# Altium PCB BDCMC_PCB.PcbDoc
Units mil, origin at the board's own origin, x right, y up, seen from the top; angles counter-clockwise.
Board outline 3500 x 2000 mil, 4 copper layers (Top Layer, Mid Layer 1, Mid Layer 2, Bottom Layer), stack 78.937 mil thick; 114 components, 60 nets, 405 pads, 112 vias.
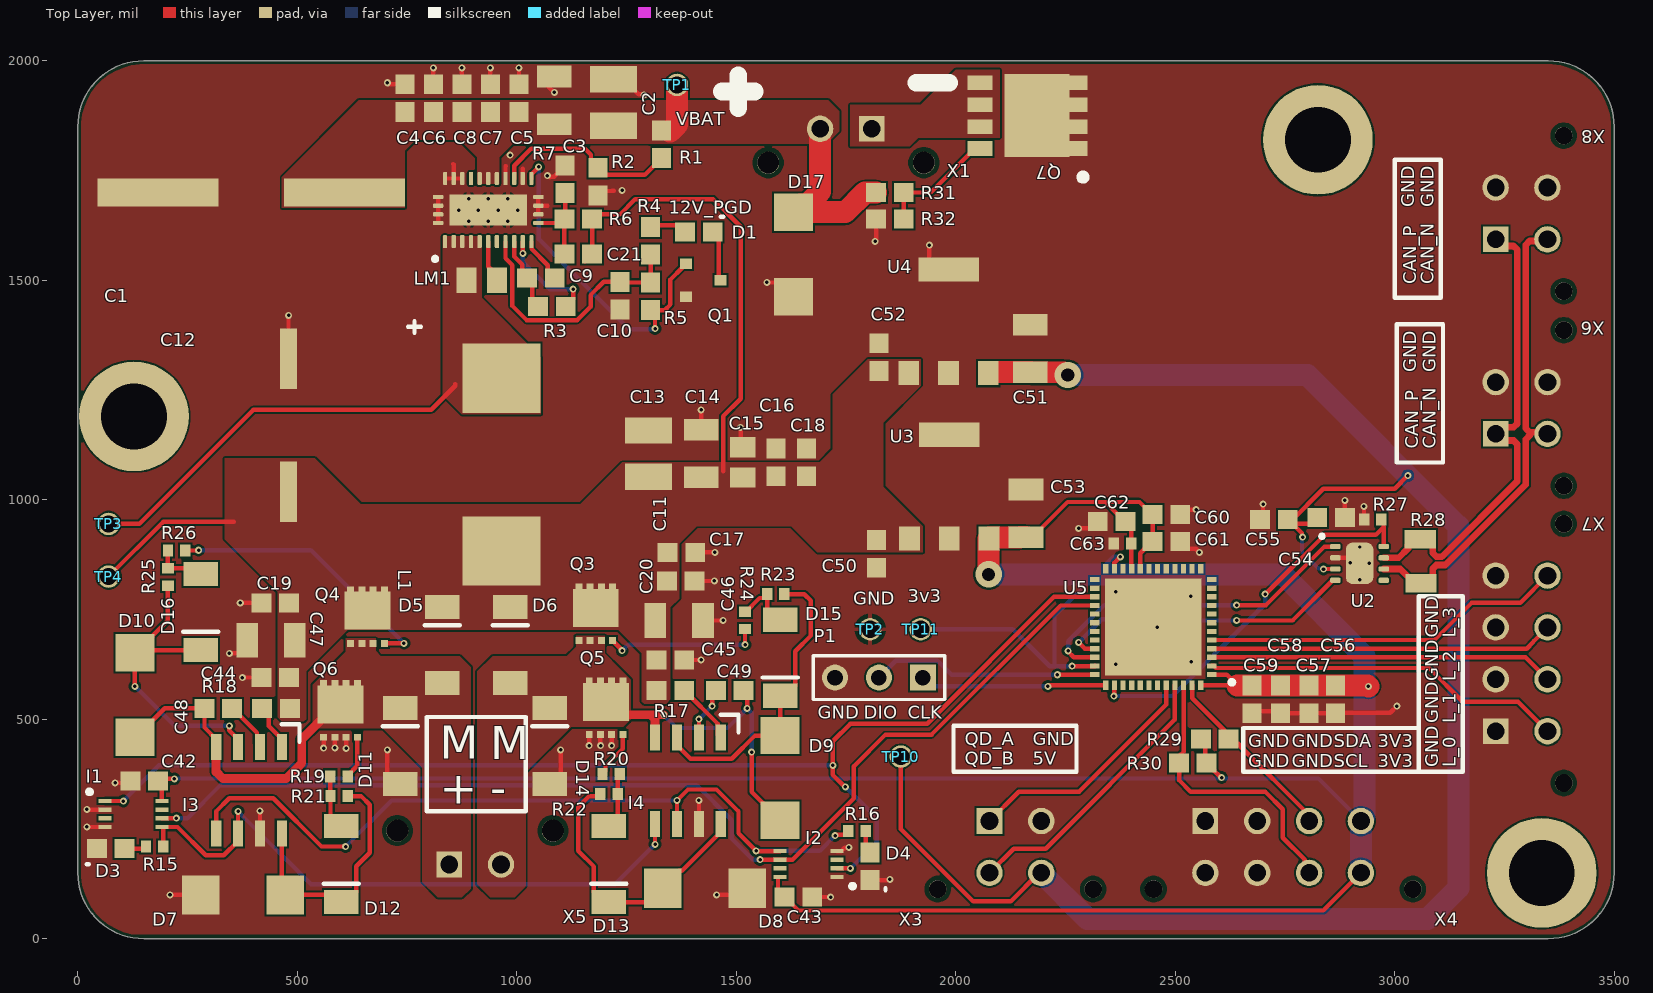
[diagram p0: Top Layer view]
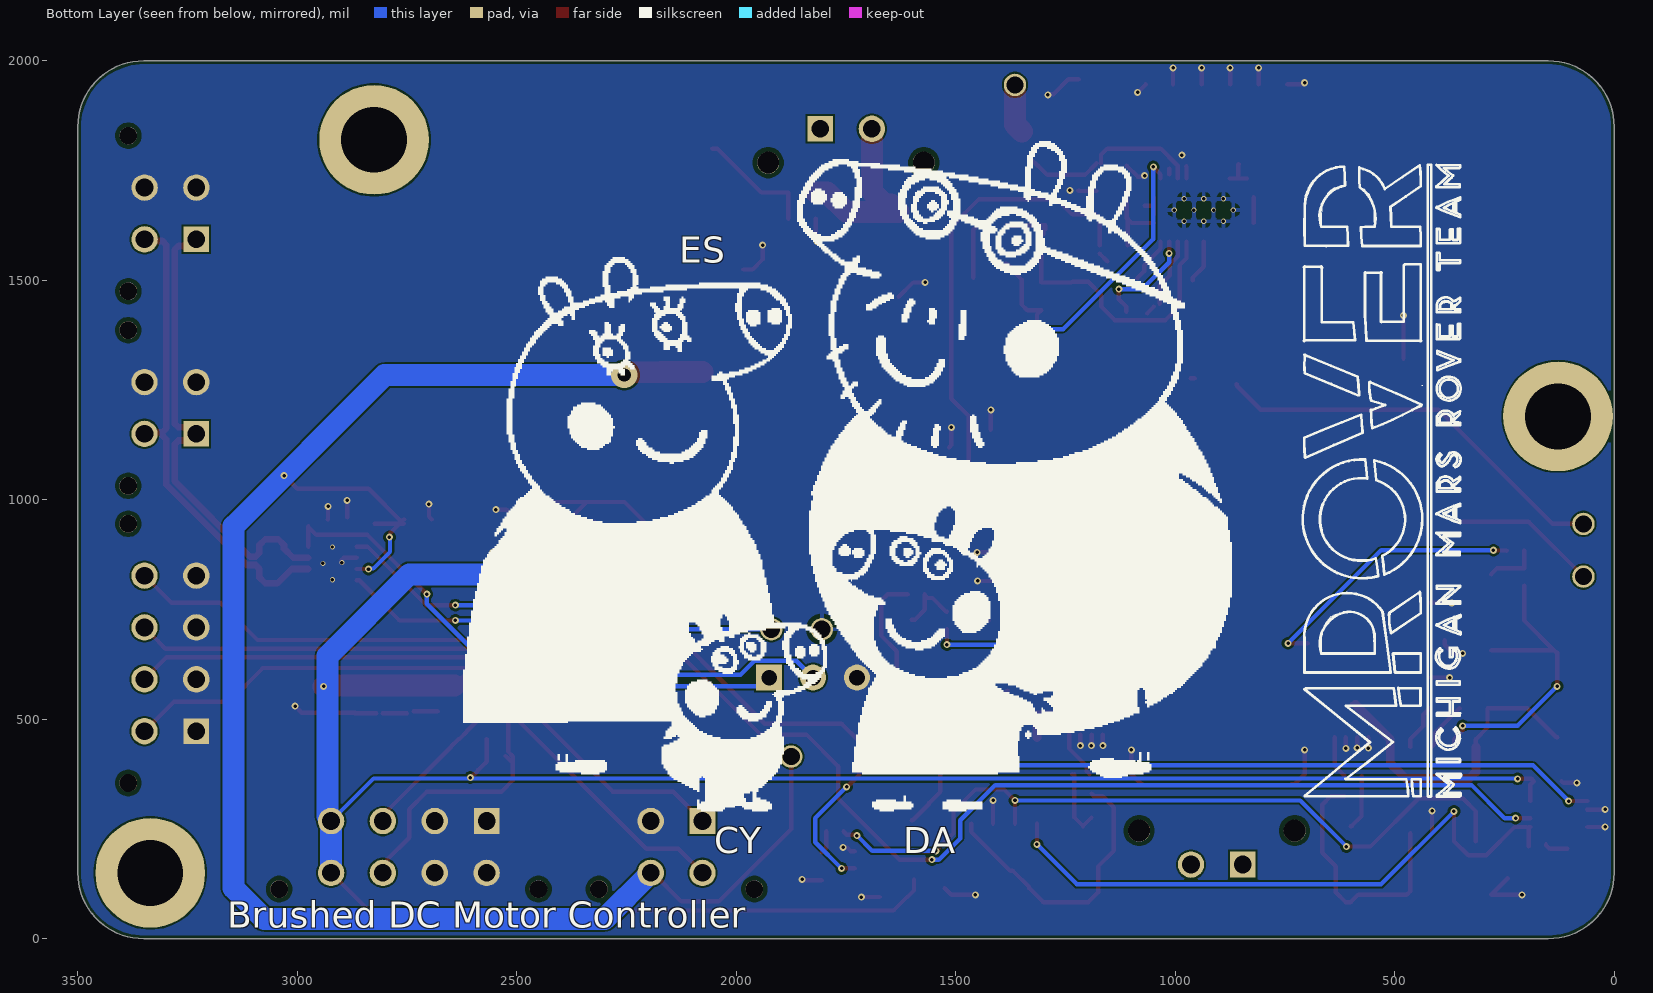
[diagram p1: Bottom Layer view, seen from below]
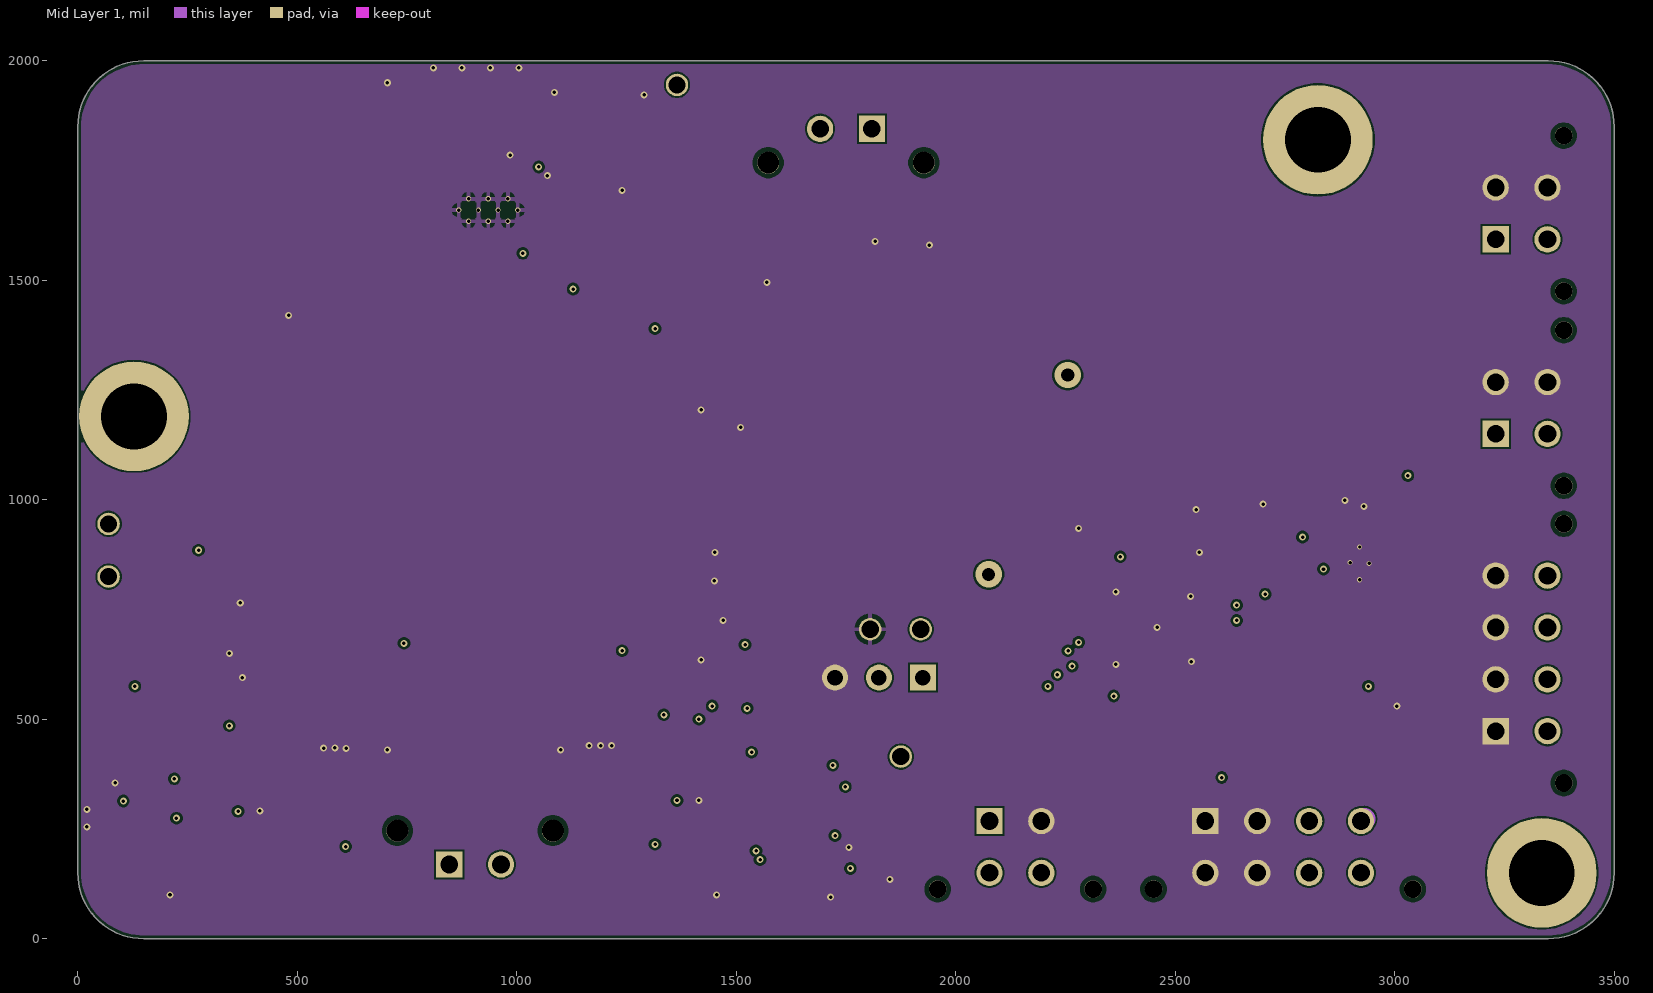
[diagram p2: Mid Layer 1]
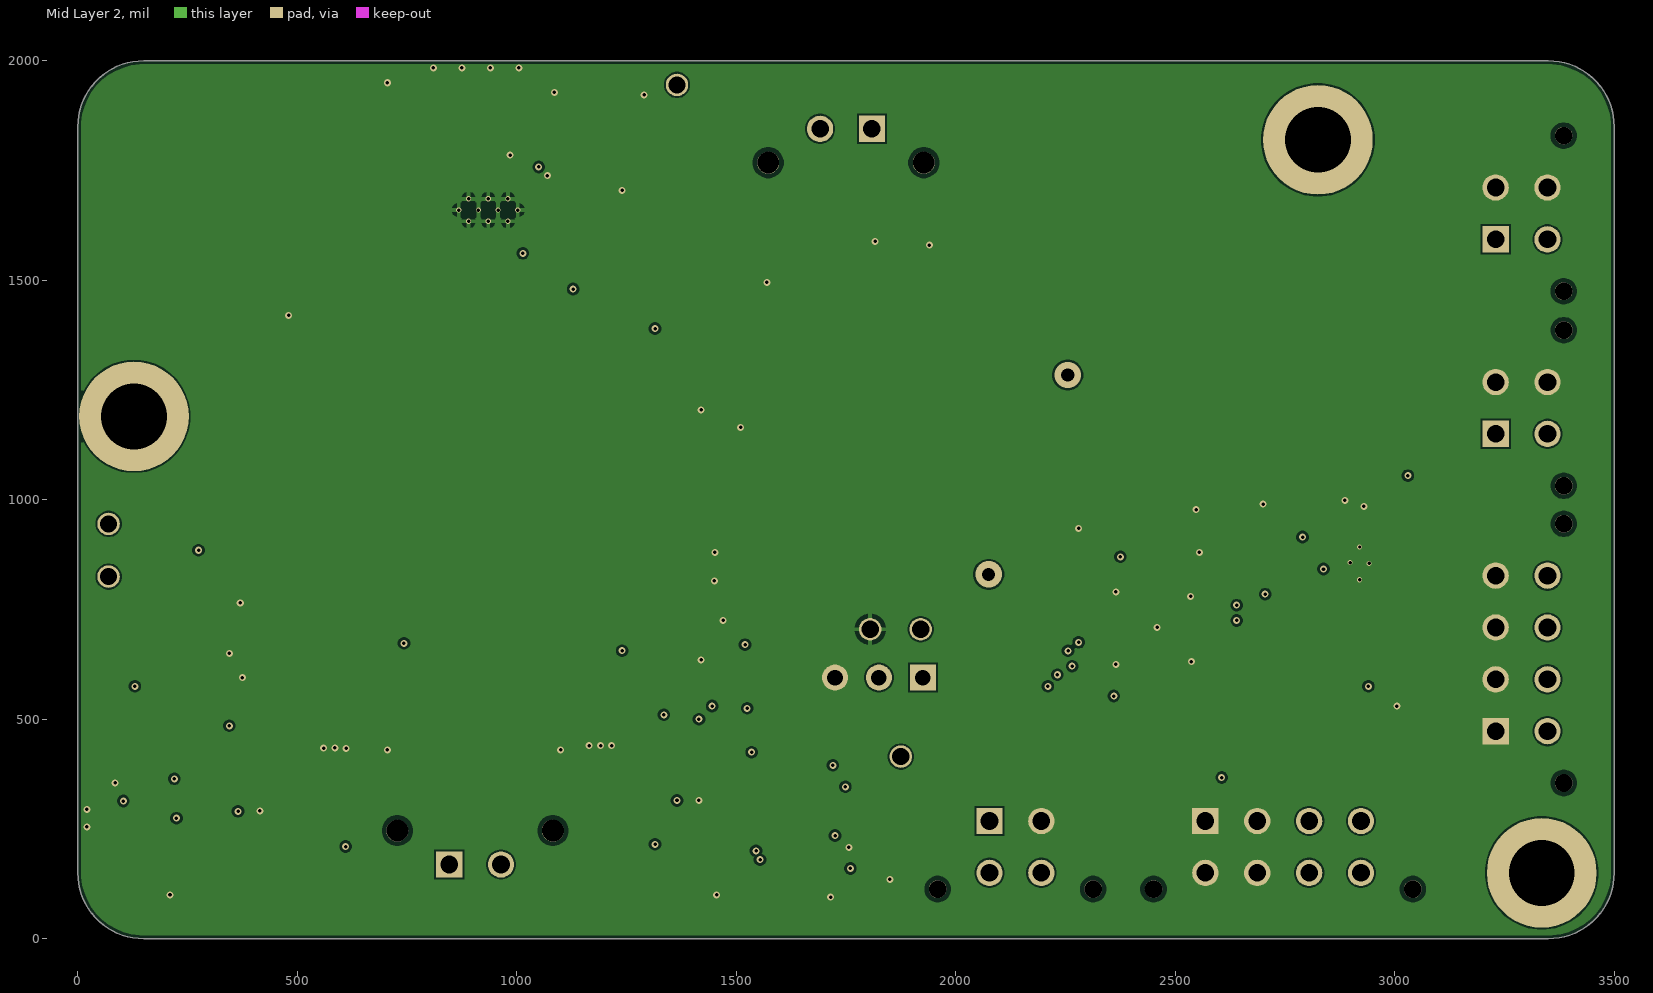
[diagram p3: Mid Layer 2]

## Layer stack, top to bottom
Top Solder: solder mask 0.5, Solder Resist, Dk 3.8
Top Layer: signal copper 1.378
Dielectric 1: prepreg 7.874, 7628, Dk 4.6
Mid Layer 1: signal copper 1.378
Core: core 57.6772, FR-4, Dk 4.5
Mid Layer 2: signal copper 1.378
Dielectric 2: prepreg 7.874, 7628, Dk 4.6
Bottom Layer: signal copper 1.378
Bottom Solder: solder mask 0.5, Solder Resist, Dk 3.8

## Board outline
0,150 0,1850 cw(c150,1850) 150,2000 3350,2000 cw(c3350,1850) 3500,1850 3500,150 cw(c3350,150) 3350,0 150,0 cw(c150,150)

## Design rules (kind name [scope] priority, off if disabled: settings)
BoardOutlineClearance [All] p1: gap=7.87 ignorepadtopadclearanceinfootprint=FALSE
Clearance [All] p1: gap=4 ignorepadtopadclearanceinfootprint=FALSE except(5: Arc-Via Track-Via SMDPad-Via THPad-Via Via-Via Via-Fill Via-Poly Via-Region Via-Text; 9.84: Arc-Hole Track-Hole SMDPad-Hole THPad-Hole Via-Hole Fill-Hole Poly-Hole Region-Hole Text-Hole)
ComponentClearance [All] p1: gap=4 collisioncheckmode=3 verticalgap=4 showdistances=TRUE
DiffPairsRouting [All] p1: maxlimit=4 minlimit=4 mostfreqgap=4 toplayer_minwidth=4 toplayer_maxwidth=71497.94 toplayer_prefwidth=4 midlayer1_minwidth=4 midlayer1_maxwidth=71497.94 midlayer1_prefwidth=4 midlayer2_minwidth=4 midlayer2_maxwidth=71497.94 midlayer2_prefwidth=4 bottomlayer_minwidth=4 bottomlayer_maxwidth=71497.94 bottomlayer_prefwidth=4 maxuncoupledlength=500
Height [All] p1: minheight=0 maxheight=71497.94 prefheight=500
HoleSize [All] p1: absolutevalues=TRUE maxlimit=248.03 minlimit=7.87 maxpercent=80.000 minpercent=20.000
HoleToHoleClearance [All] p1: gap=9.84 allowstackedmicrovias=FALSE
MinimumAnnularRing [All] p1: minimumring=3
MinimumSolderMaskSliver [All] p1: minsoldermaskwidth=0
PlaneClearance [All] p1: clearance=4
PlaneConnect PlaneConnectPowerPads [InPadClass('PowerPads')] p1: planeconnectstyle=Direct reliefexpansion=20 reliefentries=4 reliefconductorwidth=10 reliefairgap=10
PlaneConnect [All] p2: pad.planeconnectstyle=Relief pad.reliefexpansion=11.81 pad.reliefentries=4 pad.reliefconductorwidth=4 pad.reliefairgap=4 via.planeconnectstyle=Direct via.reliefexpansion=11.81 via.reliefentries=4 via.reliefconductorwidth=5 via.reliefairgap=5
PolygonConnect PolygonConnectPowerPads [All vs (InPadClass('PowerPads'))] p1: connectstyle=Direct reliefconductorwidth=10 reliefentries=4 polygonreliefangle="90 Angle" airgapwidth=10
PolygonConnect [All] p2: connectstyle=Direct reliefconductorwidth=4 reliefentries=4 polygonreliefangle="90 Angle" airgapwidth=4
RoutingVias [All] p1: holewidth=7.87 width=17.72 viastyle="Through Hole" minholewidth=7.87 minwidth=17.72 maxholewidth=248.03 maxwidth=257.87
SilkToSilkClearance [All] p1: silktosilkclearance=0
SilkToSolderMaskClearance [IsPad] p1: minsilkscreentomaskgap=4 clearancetoexposedcopper=TRUE
SolderMaskExpansion [All] p1: expansion=2.95 istentingtop=FALSE
Width [All] p1: maxlimit=71497.94 minlimit=4 preferedwidth=4
20 further rules are at their usual default settings.

## Classes and differential pairs
component class MCU_CAN: C50 C51 C52 C53 C54 C55 C56 C57 C58 C59 C60 C61 C62 C63 P1 R27 R28 R29 R30 TP10 TP11 U2 U3 U4 U5
component class HBridge_Top_Level: C42 C43 D3 D4 I1 I2 R15 R16
component class HBridge_Design: C44 C45 C46 C47 C48 C49 D5 D6 D7 D8 D9 D10 D11 D12 D13 D14 D15 D16 I3 I4 Q3 Q4 Q5 Q6 R17 R18 R19 R20 R21 R22 R23 R24 R25 R26
component class Connectors: D17 Q7 R31 R32 X1 X3 X4 X5 X6 X7 X8
component class Motor_12V_Buck: 3 C1 C2 C3 C4 C5 C6 C7 C8 C9 C10 C11 C12 C13 C14 C15 C16 C17 C18 C19 C20 C21 D1 L1 LM1 Q1 R1 R2 R3 R4 R5 R6 R7 TP1 TP2 TP3 TP4
differential pair CAN: +CAN_P -CAN_N

## Components (designator, comment, footprint, x,y, rotation, side; value= is the part's Value field where it differs from the comment)
C1 "100SEV100M12.5X16" ELEC-100U-0001 395,1700 r270 top
C2 "C3225X7R1N106K250AC" CAP-1210 1220,1905 r90 top
C3 "CL31B105KCHNNNE" "CAP-1206 - duplicate" 1085,1905 r90 top
C4 "CC0603KRX7R0BB104" CAP-0603 745,1915 r90 top
C5 "C1608C0G2A103J080AC" CAP-0603 1005,1915 r90 top
C6 "C0603Y102K1RAC7867" CAP-0603 810,1915 r90 top
C7 "0603N101J101CT" CAP-0603 940,1915 r90 top
C8 "0603N100J500CT" CAP-0603 875,1915 r90 top
C9 "CC0603KRX7R9BB333" CAP-0603 1055,1505 r180 top
C10 "UMK107BBJ225KA-T" CAP-0603 1235,1465 r270 top
C11 "KAM21KR72A474KL" CAP-0805 920,1500 r0 top
C12 "50TZV220M10X10.5" ELEC-220U-0003 480,1170 r0 top
C13 "C3225X7R1N106K250AC" CAP-1210 1300,1105 r90 top
C14 "CL31B105KCHNNNE" "CAP-1206 - duplicate" 1420,1100 r90 top
C15 "KAM21KR72A474KL" CAP-0805 1515,1085 r90 top
C16 "CC0603KRX7R0BB104" CAP-0603 1590,1085 r90 top
C17 "C1608C0G2A103J080AC" CAP-0603 1375,880 r0 top
C18 "C0603Y102K1RAC7867" CAP-0603 1660,1085 r90 top
C19 "0603N101J101CT" CAP-0603 450,765 r180 top
C20 "0603N100J500CT" CAP-0603 1373.5,815 r0 top
C21 "885012006087" CAP-0603 1140,1560 r180 top
C42 "CC0603KRX7R0BB104" CAP-0603 151.5,359 r180 top
C43 "CC0603KRX7R0BB104" CAP-0603 1641.5,95 r180 top
C44 "C1608C0G2A103J080AC" CAP-0603 450,595 r180 top
C45 "C1608C0G2A103J080AC" CAP-0603 1350,635 r0 top
C46 "CAP-1U-0001" "CAP-1206 - duplicate" 1365,725 r0 top
C47 "CAP-1U-0001" "CAP-1206 - duplicate" 445,680 r180 top
C48 "CC0603KRX7R0BB104" CAP-0603 320,525 r180 top
C49 "CC0603KRX7R0BB104" CAP-0603 1485,565 r0 top
C50 "CGA3E3X7R1H334K080AB" CAP-0603 1820,876.5 r270 top
C51 "CL31B106KBHNNNE" CAP-1206 2170,1345 r90 top
C52 "CGA3E3X7R1H334K080AB" CAP-0603 1825,1325 r90 top
C53 "CL31B106KBHNNNE" CAP-1206 2160,969.13 r90 top
C54 "TMK107BBJ475KA-T" CAP-0603 2855,960 r0 top
C55 "CC0603KRX7R0BB104" CAP-0603 2725,955 r180 top
C56 "TMK107BBJ475KA-T" CAP-0603 2865,545 r270 top
C57 "CC0603KRX7R0BB104" CAP-0603 2805,545 r270 top
C58 "CC0603KRX7R0BB104" CAP-0603 2740,545 r270 top
C59 "CC0603KRX7R0BB104" CAP-0603 2675,545 r270 top
C60 "UMK107AB7105KA-T" CAP-0603 2480,966 r0 top
C61 "CC0603KRX7R0BB104" CAP-0603 2480,905 r0 top
C62 "UMK107AB7105KA-T" CAP-0603 2355,950 r180 top
C63 "CC0402KRX7R0BB103" CAP-0402 2380,900 r180 top
D1 "150060AS75000" LED-0603 1415,1610 r0 top
D3 "150060AS75000" LED-0603 75,205 r180 top
D4 "150060AS75000" LED-0603 1805,165 r270 top
D5 "PMEG6030EP,115" DIO-SOD128 830,669 r180 top
D6 "PMEG6030EP,115" DIO-SOD128 985,669 r180 top
D7 "SMBJ12CA" "DO-214AA (SMBJ)" 375,100 r0 top
D8 "SMBJ12CA" "DO-214AA (SMBJ)" 1430,115 r180 top
D9 "SMBJ12CA" "DO-214AA (SMBJ)" 1600,365 r90 top
D10 "SMBJ12CA" "DO-214AA (SMBJ)" 130,554 r90 top
D11 "PMEG6030EP,115" DIO-SOD128 735,439 r180 top
D12 "PMEG6030EP,115" DIO-SOD128 600,170 r0 top
D13 "PMEG6030EP,115" DIO-SOD128 1210,170 r0 top
D14 "PMEG6030EP,115" DIO-SOD128 1075,439 r180 top
D15 "PMEG6030EP,115" DIO-SOD128 1600,640 r0 top
D16 "PMEG6030EP,115" DIO-SOD128 280,744 r0 top
D17 "SMBJE43CAH" "DO-214AA (SMBJ)" 1630,1560 r270 top
I1 "SN74LVC2G157DCUR" IC-MUX-8VSSOP 61.57,254.63 r0 top
I2 "SN74LVC2G157DCUR" IC-MUX-8VSSOP 1729.92,199.69 r180 top
I3 "UCC27284QDQ1" IC-BUCK-8SOIC 390,338.43 r180 top
I4 "UCC27284QDQ1" IC-BUCK-8SOIC 1390,360 r180 top
L1 "SRP1270-100M" PWRIND-10U-0002 965,1080 r270 top
LM1 "LM76005RNPR" IC-30-WQFN(6x4) 935,1660 r90 top
P1 "Header 3" HDR1X3 1925,595 r180 top
Q1 "T2N7002AK,LM" NMOS-SOT23-3 1425,1500 r270 top
Q3 "TPN11006PL,LQ" NMOS-8TSON 1180,740 r0 top
Q4 "TPN11006PL,LQ" NMOS-8TSON 660,734 r0 top
Q5 "TPN11006PL,LQ" NMOS-8TSON 1203.39,526.02 r0 top
Q6 "TPN11006PL,LQ" NMOS-8TSON 598.39,520.02 r0 top
Q7 "TPH7R006PL,L1Q" NMOS-8PowerVDFN 2275,1800 r90 top
R1 "RC0603FR-072M15L" RES-0603 1330,1810 r90 top
R2 "RC0603FR-07100KL" RES-0603 1185,1725 r270 top
R3 "RC0603FR-0776K8L" RES-0603 1080,1440 r180 top
R4 "AC0603FR-10100RL" RES-0603 1305,1590 r90 top
R5 "RC0603FR-0710KP" RES-0603 1305,1463.5 r90 top
R6 "RC0603FR-07100KL" RES-0603 1140,1640 r180 top
R7 "RC0603FR-079K09L" RES-0603 1110,1730 r90 top
R15 "RC0402JR-07100RP" RES-0402 175,210 r180 top
R16 "RC0402JR-07100RP" RES-0402 1775,245 r0 top
R17 "RNCP0603FTD1R00" RES-0603 1350,565 r180 top
R18 "RNCP0603FTD1R00" RES-0603 451.5,525 r0 top
R19 "RC0402JR-0733RP" RES-0402 595,370 r0 top
R20 "RC0402JR-0733RP" RES-0402 1215,375 r0 top
R21 "RC0402JR-0733RP" RES-0402 595.32,325 r0 top
R22 "RC0402JR-0733RP" RES-0402 1210,330 r180 top
R23 "RC0402JR-0733RP" RES-0402 1590,785 r0 top
R24 "RC0402JR-0733RP" RES-0402 1520,725.32 r270 top
R25 "RC0402JR-0733RP" RES-0402 205,824 r270 top
R26 "RC0402JR-0733RP" RES-0402 225,884 r0 top
R27 "RC0402FR-074K7P" RES-0402 2950,955 r0 top
R28 "CRGH1206F120R" RES-1206 3060,860 r90 top
R29 "AF0603FR-074K7L" RES-0603 2590,455 r180 top
R30 "AF0603FR-074K7L" RES-0603 2540,400 r0 top
R31 "ERJ-3EKF2003V" RES-0603 1850,1700 r0 top
R32 "RC0603FR-07100KL" RES-0603 1850,1640 r0 top
TP1 "5003" TEST-POINT-0001 1365,1945 r270 top
TP2 "5003" TEST-POINT-0001 1805,705 r0 top
TP3 "5003" TEST-POINT-0001 70,945 r90 top
TP4 "5003" TEST-POINT-0001 70,825 r90 top
TP10 "5003" TEST-POINT-0001 1875,415 r270 top
TP11 "5003" TEST-POINT-0001 1920,705 r180 top
U2 "TCAN1042HGDRBTQ1" IC-8-VSON 2920,855 r0 top
U3 "UA78M33CDCYR" IC-SOT-223-4 1985,1030 r90 top
U4 "UA78M05IDCYR" IC-SOT-223-4 1983.74,1406.55 r90 top
U5 "STM32G431CBU6" MCU-UFQFPN48 2450,710 r180 top
X1 "Molex 43650-0215" 43650-0215 1750,1845 r0 top
X3 "Molex 43045-0412" 43045-0412 2135.94,268.11 r180 top
X4 "Molex 43045-0812" 43045-0812 2745.94,268.11 r180 top
X5 "Molex 43650-0215" 43650-0215 905,169 r180 top
X6 "Molex 43045-0412" 43045-0412 3230,1209.06 r270 top
X7 "Molex 43045-0812" 43045-0812 3230,650 r270 top
X8 "Molex 43045-0412" 43045-0412 3229.88,1652.17 r270 top

## Footprints (in the part's own frame and the unit in brackets; to place one, negate y for a bottom-side part, rotate by r counter-clockwise, add the part's x,y. Pads: shape width x height; smd on the part's side, far side on the other; paste and mask are expansions set on the pad)
43045-0412 [mm]
  round 1.02 hole 1.02 unplated: 1(-4.5,3.94) 1(4.5,3.94)
  rect 1.482x1.482 / inner rect 1.524x1.524 / far side rect 1.482x1.482 hole 1.02: P$1(1.5,0)
  round 1.53 / inner round 1.524 / far side round 1.53 hole 1.02: P$2(-1.5,0) P$3(1.5,3) P$4(-1.5,3)
  body extent -5.07,-2.45 5.08,6.32, height 10.03
43045-0812 [mm]
  round 1.02 hole 1.02 unplated: 1(-7.5,3.94) 1(7.5,3.94)
  rect 1.482x1.482 / inner rect 1.524x1.524 / far side rect 1.482x1.482 hole 1.02: P$1(4.5,0)
  round 1.53 / inner round 1.524 / far side round 1.53 hole 1.02: P$2(1.5,0) P$3(-1.5,0) P$4(-4.5,0) P$5(4.5,3) P$6(1.5,3) P$7(-1.5,3) P$8(-4.5,3)
  body extent -8.07,-2.45 8.08,6.32, height 10.03
43650-0215 [mil]
  round 50 hole 50 unplated: 1(-177.17,-77.17) 1(177.17,-77.17)
  rect 58.33x58.33 / inner rect 60x60 / far side rect 58.33x58.33 hole 40.16: P$1(59.06,0)
  round 60.24 / inner round 60 / far side round 60.24 hole 40.16: P$2(-59.06,0)
  body extent -190,-97 190,123, height 395
CAP-0402 [mm]
  rect 0.6x0.7 smd: 1(-0.5,0) 2(0.5,0)
  body extent -0.5,-0.22 0.5,0.23, height 0.5
CAP-0603 [mm]
  rect 1.15x1.1 smd: 1(-0.8,0) 2(0.8,0)
  body extent -0.8,-0.45 0.8,0.45, height 0.8
CAP-0805 [mm]
  rect 1.16x1.47 smd: 1(-0.88,0) 2(0.88,0)
  body extent -1,-0.63 1,0.63, height 0.94
CAP-1206 [mm]
  rect 1.25x2 smd: 1(-1.375,0) 2(1.375,0)
  body extent -1.6,-0.8 1.6,0.8, height 1.5
"CAP-1206 - duplicate" [mm]
  rect 1.25x2 smd: 1(-1.248,0) 2(1.502,0)
  body extent -1.47,-0.8 1.73,0.8, height 1.5
CAP-1210 [mm]
  rect 1.53x2.72 smd: 1(-1.341,0) 2(1.341,0)
  body extent -1.6,-1.25 1.6,1.25, height 2.7
DIO-SOD128 [mm]
  rect 2x1.4 smd: 1(0,2.2) 2(0,-2.2)
  silkscreen extent -1.02,-1.14 1.02,-1.14, body extent -1.25,-2.35 1.25,2.35, height 1.05
"DO-214AA (SMBJ)" [mm]
  rect 2.16x2.26 smd: 1(-2.416,0) 2(2.484,0)
  body extent -2.72,-1.95 2.78,1.95, height 2.45
ELEC-100U-0001 [mm]
  rect 1.6x7 smd: 1(0,5.4) 2(0,-5.4)
  silkscreen extent 7.45,9.08 8.13,9.82, body extent -6.6,-7.15 6.6,7.15, height 16.56
ELEC-220U-0003 [mm]
  rect 1x3.5 smd: 1(0,-3.85) 2(0,3.85)
  body extent -5.25,-5.45 5.25,5.45, height 10.54
HDR1X3 [mm] "Connector; Header; 3 Position"
  rect 1.5x1.5 hole 0.9: 1(0,0)
  round 1.5 hole 0.9: 2(2.54,0) 3(5.08,0)
  silkscreen extent -1.27,-1.27 6.35,1.27
IC-8-VSON [mm]
  rrect50% 0.6x0.3 smd mask+0.07: 1(-1.4,0.975) 2(-1.4,0.325) 3(-1.4,-0.325) 4(-1.4,-0.975) 5(1.4,-0.975) 6(1.4,-0.325) 7(1.4,0.325) 8(1.4,0.975)
  rrect50% 1.6x2.4 smd: 9(0,0)
  silkscreen extent -2.26,1.48 -2.08,1.67, body extent -1.5,-1.5 1.5,1.5, height 1
IC-30-WQFN(6x4) [mm] "30 pin WQFN with exposed pad"
  rrect50% 0.75x0.25 smd mask+0.07: 1(-1.825,2.5) 2(-1.825,2) 3(-1.825,1.5) 4(-1.825,1) 5(-1.825,0.5) 6(-1.825,0) 7(-1.825,-0.5) 8(-1.825,-1) 9(-1.825,-1.5) 10(-1.825,-2) 11(-1.825,-2.5) 16(1.825,-2.5) 17(1.825,-2) 18(1.825,-1.5) 19(1.825,-1) 20(1.825,-0.5) 21(1.825,0) 22(1.825,0.5) 23(1.825,1) 24(1.825,1.5) 25(1.825,2) 26(1.825,2.5)
  rrect50% 0.25x0.6 smd mask+0.07: 12(-0.75,-2.9) 13(-0.25,-2.9) 14(0.25,-2.9) 15(0.75,-2.9) 27(0.75,2.9) 28(0.25,2.9) 29(-0.25,2.9) 30(-0.75,2.9)
  rect 1.8x4.5 smd: 31(0,0)
  silkscreen extent -2.94,2.96 -2.71,3.19, body extent -2,-3 2,3, height 0.8
IC-BUCK-8SOIC [mm]
  rect 0.6x1.5 smd: 1(-1.905,-2.5) 2(-0.635,-2.5) 3(0.635,-2.5) 4(1.905,-2.5) 5(1.905,2.5) 6(0.635,2.5) 7(-0.635,2.5) 8(-1.905,2.5)
  silkscreen extent -2.92,-3.81 -1.9,-2.79, body extent -2.45,-3 2.45,3, height 1.75
IC-MUX-8VSSOP [mm]
  rect 0.75x0.25 smd: 1(0,1.5) 2(0,1) 3(0,0.5) 4(0,0) 5(3.3,0) 6(3.3,0.5) 7(3.3,1) 8(3.3,1.5)
  silkscreen extent -1.02,1.91 -0.76,2.16, body extent 0.1,-0.24 3.2,1.76, height 0.9
IC-SOT-223-4 [mm]
  rect 1.4x1.2 smd mask+0.07: 1(-3,2.3) 2(-3,0) 3(-3,-2.3)
  rect 1.4x3.5 smd: 2(3,0)
  body extent -3.5,-3.25 3.5,3.25, height 1.68
LED-0603 [mm]
  rect 1.15x1.1 smd: 1(-0.8,0) 2(0.8,0)
  silkscreen extent 1.27,0.89 1.4,0.89, body extent -0.8,-0.3 0.8,0.3, height 1
MCU-UFQFPN48 [mm] "STM32G431CBU6"
  rect 0.55x0.3 smd mask+0.07: 1(-3.375,2.75) 2(-3.375,2.25) 3(-3.375,1.75) 4(-3.375,1.25) 5(-3.375,0.75) 6(-3.375,0.25) 7(-3.375,-0.25) 8(-3.375,-0.75) 9(-3.375,-1.25) 10(-3.375,-1.75) 11(-3.375,-2.25) 12(-3.375,-2.75) 25(3.375,-2.75) 26(3.375,-2.25) 27(3.375,-1.75) 28(3.375,-1.25) 29(3.375,-0.75) 30(3.375,-0.25) 31(3.375,0.25) 32(3.375,0.75) 33(3.375,1.25) 34(3.375,1.75) 35(3.375,2.25) 36(3.375,2.75)
  rect 0.3x0.55 smd mask+0.07: 13(-2.75,-3.375) 14(-2.25,-3.375) 15(-1.75,-3.375) 16(-1.25,-3.375) 17(-0.75,-3.375) 18(-0.25,-3.375) 19(0.25,-3.375) 20(0.75,-3.375) 21(1.25,-3.375) 22(1.75,-3.375) 23(2.25,-3.375) 24(2.75,-3.375) 37(2.75,3.375) 38(2.25,3.375) 39(1.75,3.375) 40(1.25,3.375) 41(0.75,3.375) 42(0.25,3.375) 43(-0.25,3.375) 44(-0.75,3.375) 45(-1.25,3.375) 46(-1.75,3.375) 47(-2.25,3.375) 48(-2.75,3.375)
  rect 5.6x5.6 smd: 49(0,0)
  silkscreen extent -4.68,3.08 -4.43,3.32, body extent -3.56,-3.56 3.56,3.56, height 0.61
NMOS-8PowerVDFN [mm]
  rect 0.85x1.45 smd: 1(0,5.588) 2(1.27,5.588) 2(2.54,5.588) 2(3.81,5.588)
  rect 0.85x1.05 smd: 3(0,-0.112) 3(1.27,-0.112) 3(2.54,-0.112) 3(3.81,-0.112)
  rect 4.8x3.75 smd: 3(1.905,2.286)
  silkscreen extent -1.91,-0.64 -1.4,-0.13
NMOS-8TSON [mm]
  rect 0.4x0.4 smd: 1(0.975,-1.55) 2(-0.975,-1.55) 2(-0.325,-1.55) 2(0.325,-1.55)
  rect 0.4x0.3 smd: 3(-0.975,1.6) 3(-0.325,1.6) 3(0.325,1.6) 3(0.975,1.6)
  rect 2.65x2.2 smd: 3(0,0.35)
  body extent -1.65,-1.65 1.65,1.65, height 0.85
NMOS-SOT23-3 [mm]
  rect 0.6x0.7 smd: 1(-0.95,-1) 2(0.95,-1) 3(0,1)
  body extent -1.46,-1.18 1.46,1.19, height 1.12
PWRIND-10U-0002 [mm]
  rect 4x4.5 smd: 1(-5,0) 2(5,0)
  body extent -6.85,-6.45 6.85,6.45, height 7.06
RES-0402 [mm]
  rect 0.6x0.7 smd: 1(-0.5,0) 2(0.5,0)
  body extent -0.5,-0.25 0.5,0.25, height 0.3
RES-0603 [mm]
  rect 1.15x1.1 smd: 1(-0.8,0) 2(0.8,0)
  body extent -0.8,-0.4 0.8,0.4, height 0.43
RES-1206 [mm]
  rect 1.05x1.8 smd: 1(-1.275,0) 2(1.275,0.043)
  body extent -1.6,-0.77 1.6,0.82, height 0.55
TEST-POINT-0001 [mm] "2024 miniature test point"
  round 1.3 hole 1: 1(0,0)
  body extent -1.27,-1.27 1.27,1.27, height 4.57

## Part data
C1: library part ELEC-100U-0001, "100 µF 100 V Aluminum Electrolytic Capacitors Radial, Can - SMD 2000 Hrs @ 85°C", Capacitance="100 uF", Manufacturer=Rubycon, Tolerance="+/- 20%", Voltage="100 V", Assembled?=No, ESR="idk check the datasheet i couldnt find it"
C2 C13: library part CAP-10U-0004, "10 µF ±10% 75V Ceramic Capacitor X7R 1210 (3225 Metric)", Capacitance="10 uF +/- 10%", Voltage Rating=75V
C3 C14: library part CAP-1U-0001, "1 µF ±10% 100V Ceramic Capacitor X7R 1206 (3216 Metric)", Capacitance="1 uF +/- 10%", Voltage=100V
C4 C16 C42 C43 C48 C49 C55 C57 C58 C59 C61: library part CAP-100N-0001, "CAP CER 0.1UF 100V X7R 0603", Capacitance="100nF +/-10%", Manufacturer=YAGEO, Package Size=0603, Temperature Coefficient=X7R, Voltage Rating=100V, Assembled?=no, Manufacturer Part Number=CC0603KRX7R0BB104
C5 C17 C44 C45: library part CAP-10N-0002, "CAP CER 10000PF 100V C0G 0603", Capacitance="10nF +/-5%", Manufacturer="TDK Corporation", Package Size=0603, Temperature Coefficient=C0G/NP0, Voltage Rating=100V, Assembled?=no, Manufacturer Part Number=C1608C0G2A103J080AC
C6 C18: library part CAP-1N-0001, "1000 pF ±10% 100V Ceramic Capacitor X7R 0603 (1608 Metric)", Capacitance="1 nF +/-10%", Voltage=100V
C7 C19: library part CAP-100P-0002, "100 pF ±5% 100V Ceramic Capacitor C0G, NP0 0603 (1608 Metric)", Capacitance="100 pF", Package Size=0603, Temp Coeff=C0G/NP0, Tolerance=+/-5%, Voltage=100V
C8 C20: library part CAP-10P-0001, "10 pF ±5% 50V Ceramic Capacitor C0G, NP0 0603 (1608 Metric)", Capacitance="10 pF +/- 5%", Manufacturer="Walshin Technology Corporation", Package Size=0603, Temperature Coefficient="C0G, NP0", Voltage Rating=50V, Assembled?=Yes, Manufacturer Part Number=0603N100J500CT
C9: library part CAP-33N-0001, "0.033 µF ±10% 50V Ceramic Capacitor X7R 0603 (1608 Metric)", Capacitance="33nF +/-10%", Manufacturer=YAGEO, Package Size=0603, Temperature Coefficient=X7R, Voltage Rating=50V, Assembled?=no, Manufacturer Part Number=CC0603KRX7R9BB333
C10: library part CAP-2.2U-0001, "2.2 µF ±10% 50V Ceramic Capacitor X5R 0603 (1608 Metric)", Capacitance="2.2 uF", oltage=50V
C11 C15: library part CAP-0.47U-0001, "0.47 µF ±10% 100V Ceramic Capacitor X7R 0805 (2012 Metric)", Capacitance="0.47 uF", Package Size=0805, Temperature Coefficient=X7R, Tolerance="+/- 10%", Voltage=100V, Assembled?=No
C12: library part ELEC-220U-0003, "220 µF 50 V Aluminum Electrolytic Capacitors Radial, Can - SMD 2000 Hrs @ 105°C", Capacitance="220 uF +/- 20%", Voltage Rating=50V, Size=.406inx.406in*.413in
C21: library part CAP-1P-0001, "1 pF ±0.25pF 100V Ceramic Capacitor C0G, NP0 0603 (1608 Metric)", Capacitance="1 pF", Package Size=0603, Temperature Coefficient=C0G/NP0, Tolerance="+/- 0.25 pF", Voltage=100V, Assembled?=No
C46 C47: "1 µF ±10% 100V Ceramic Capacitor X7R 1206 (3216 Metric)", Capacitance="1 uF +/- 10%", Voltage=100V
C50 C52: library part CAP-0.33uF-0001, "0.33 µF ±10% 50V Ceramic Capacitor X7R 0603 (1608 Metric)", Capacitance="0.33 uF", Manufacturer="TDK Corporation", Temperature Coefficient=X7R, Tolerance="+/- 10%", Voltage=50V, Manufacturer Part Number=CGA3E3X7R1H334K080AB
C51 C53: library part CAP-10U-0001, "10 µF ±10% 50V Ceramic Capacitor X7R 1206 (3216 Metric)", Capacitance="10uF +/-20%", Manufacturer="Samsung Electro-Mechanics", Package Size=1206, Temperature Coefficient=X7R, Voltage Rating=50V, Assembled?=no, Manufacturer Part Number=CL31B106KBHNNNE
C54 C56: library part CAP-4.7U-0001, "4.7 µF ±10% 25V Ceramic Capacitor X5R 0603 (1608 Metric)", Capacitance="4.7uF +/-10%", Manufacturer="Taiyo Yuden", Package Size=0603, Temperature Coefficient=X5R, Voltage Rating=25V, Assembled?=no, Manufacturer Part Number=TMK107BBJ475KA-T
C60 C62: library part CAP-1U-0002, "1 µF ±10% 50V Ceramic Capacitor X7R 0603 (1608 Metric)", Capacitance="1 uF", Package Size=0603, Voltage=50V
C63: library part CAP-10N-0001, "10000 pF ±10% 100V Ceramic Capacitor X7R 0402 (1005 Metric)", Capacitance="10nF +/-10%", Manufacturer=YAGEO, Package Size=0402, Temperature Coefficient=X7R, Voltage Rating=100V, Assembled?=no, Manufacturer Part Number=CC0402KRX7R0BB103
D1 D3 D4: library part LED_Amber_0001, "CAP CER 0.1UF 100V X7R 0603", Color=Amber, Current Rating=20mA, Manufacturer="Wurth Electronik", Package Size=0603, Assembled?=no, Manufacturer Part Number=150060AS75000, Vf=2V
D5 D6 D11 D12 D13 D14 D15 D16: library part DIO-0.53V-0001, "Diode Schottky 60 V 3A Surface Mount SOD-128/CFP5", Current Rating=3A, Manufacturer="Nexperia USA Inc.", Package=SOD-128/CFP5, Vf (Voltage Forward)="530 mV", Assembled=no, Manufacturer Part Number=PMEG6030EP,115
D7 D8 D9 D10: library part DIO-19.9V-0001, "19.9V Clamp 30.2A Ipp Tvs Diode Surface Mount DO-214AA (SMBJ)", Breakdown Voltage=13.3, Current Rating=30.2A, Manufacturer="Littlefuse Inc.", Package="DO-214AA (SMBJ)", Standoff Voltage=12V, Assembled=No, Manufacturer Part Number=SMBJ12CA
D17: library part DIO-69.4V-0001, "69.4V Clamp 8.7A Ipp Tvs Diode Surface Mount DO-214AA (SMBJ)", Breakdown Voltage=47.8V, Package="DO-214AA (SMBJ)", Peak pulser current=8.7A, Reverse working maximum voltage=43V, Channels=Bidirectional, Vclamp=69.4V
I1: library part IC-MUX-0001
I2: library part IC-MUX-0001, "Multiplexer 1 x 2:1 8-VSSOP", Vin=1.65-5.5V
I3 I4: library part IC-GDRV-0001, "Gate Drivers Automotive 3-A, 120-V half bridge gate driver with 5-V UVLO and enable 8-SOIC -40 to 125", Load Voltage-Max=120V, Manufacturer="Texas Instruments", Package=SOIC-8, Supply Current=3A, Assembled?=no, Manufacturer Part Number=UCC27284QDQ1, VCC-Max=16V, VCC-Min=5.5V
L1: library part PWRIND-10U-0002, "10 µH Shielded Drum Core, Wirewound Inductor 10 A 16.8mOhm Max Nonstandard", Inductance="10 uH", Tolerance="+/- 20%", Assembled?=No, DCI="10 A", DCR="16.8 mOhm", Isat=16A
LM1: library part IC-BUCK-0006, "Buck Switching Regulator IC Positive Adjustable 1V 1 Output 5A 30-WFQFN Exposed Pad", Current=5A, Manufacturer="Texas Instruments", Package=30-WFQFN, Assembled?=no, Manufacturer Part Number=LM76005RNPR, Type=Buck
P1: "Header, 3-Pin", LatestRevisionDate=17-Jul-2002, LatestRevisionNote="Re-released for DXP Platform.", Publisher="Altium Limited"
Q1: library part NMOS-200MA-0001, "MOSFET N-CH 60V 200MA SOT23", Manufacturer=Toshiba, Package=SOT-23-3, Assembled?=no, FET type=N-Channel, Id-Continuous=200mA, Manufacturer Part Number=T2N7002AK,LM, Rds On-Max=3.9Ohm, VDS-Max=60V, Vgs-Max=20V
Q3 Q4 Q5 Q6: library part NMOS-26A-0001, "MOSFET N-CH 60V 200MA SOT23", Manufacturer=Toshiba, Package="8-TSON Advance", Assembled?=no, FET type=N-Channel, Id-Continuous=26A, Manufacturer Part Number=TPN11006PL,LQ, Rds On-Max=18.1mOhm, VDS-Max=60V, Vgs-Max=20V
Q7: library part NMOS-60A-0001, "N-Channel 60 V 60A (Tc) 81W (Tc) Surface Mount 8-SOP Advance (5x5)", Drain Current=60A, Package=8-PowerVDFN, Vdss=60V, Vgs="2.5V @ 220uA", Vgs(Max)=20V
R1: library part RES-2.15M-0001, "2.15 MOhms ±1% 0.1W, 1/10W Chip Resistor 0603 (1608 Metric) Moisture Resistant Thick Film", Package Size=0603, Power="1/10 W", Resistance="2.15 MOhm", Tolerance=+/-1%, Assembled?=No
R2 R6 R32: library part RES-100K-0003, "100 kOhms ±1% 0.1W, 1/10W Chip Resistor 0603 (1608 Metric) Moisture Resistant Thick Film", Package Size=0603, Power="1/10 W", Resistance="100 kOhm", Tolerance="+/- 1%", Assembled?=No
R3: library part RES-76.8K-0001, "76.8 kOhms ±1% 0.1W, 1/10W Chip Resistor 0603 (1608 Metric) Moisture Resistant Thick Film", Manufacturer=Yageo, Package Size=0603, Power="1/10 W", Resistance="76.8 kOhm", Tolerance="+/- 1%"
R4: library part RES-100-0002, "100 Ohms ±1% 0.1W, 1/10W Chip Resistor 0603 (1608 Metric) Automotive AEC-Q200 Thick Film", Manufacturer=YAGEO, Package Size=0603, Power Rating=1/10W, Resistance="100Ohm +/-1%", Assembled?=no, Manufacturer Part Number=AC0603FR-10100RL
R5: library part RES-10K-0002, "RES SMD 10K OHM 1% 1/10W 0603", Manufacturer=YAGEO, Package Size=0603, Power Rating=1/10W, Resistance="10kOhm +/-1%", Assembled?=no, Manufacturer Part Number=RC0603FR-0710KP
R7: library part RES-9.09K-0001, "9.09 kOhms ±1% 0.1W, 1/10W Chip Resistor 0603 (1608 Metric) Moisture Resistant Thick Film", Package Size=0603, Power="1/10 W", Resistance="9.09 kOhm", Tolerance=+/-1%, Assembled?=No
R15 R16: library part RES-100-0001, "RES SMD 100 OHM 5% 1/16W 0402", Manufacturer=YAGEO, Package Size=0402, Power Rating=1/16W, Resistance="100Ohm +/-5%", Assembled?=no, Manufacturer Part Number=RC0402JR-07100RP
R17 R18: library part RES-1-0001, "1 Ohms ±1% 0.125W, 1/8W Chip Resistor 0603 (1608 Metric) Anti-Sulfur Thin Film", Power="1/8 W", Resistance="1 Ohms ±1%"
R19 R20 R21 R22 R23 R24 R25 R26: library part RES-33-0001, "RES SMD 33 OHM 5% 1/16W 0402", Manufacturer=YAGEO, Package Size=0402, Power Rating=1/16W, Resistance="33Ohm +/-5%", Assembled?=no, Manufacturer Part Number=RC0402JR-0733RP
R27: library part RES-4.7K-0001, "RES SMD 4.7K OHM 1% 1/16W 0402", Manufacturer=YAGEO, Package Size=0402, Power Rating=1/16W, Resistance="4.7kOhm +/-1%", Assembled?=no, Manufacturer Part Number=RC0402FR-074K7P
R28: library part RES-120-0002, "120 Ohms ±1% 0.5W, 1/2W Chip Resistor 1206 (3216 Metric) Thick Film", Package Size=1206, Power="0.5 W", Resistance="120 Ohm", Tolerance=1%
R29 R30: library part RES-4.7K-0002, "RES SMD 4.7K OHM 1% 1/10W 0603", Manufacturer=YAGEO, Package Size=0603, Power Rating=1/10W, Resistance="4.7kOhm +/-1%", Assembled?=no, Manufacturer Part Number=AF0603FR-074K7L
R31: library part RES-200K-0001, "200 kOhms ±1% 0.1W, 1/10W Chip Resistor 0603 (1608 Metric) Automotive AEC-Q200 Thick Film", Manufacturer="Panasonic Electronic Components", Package Size=0603, Power Rating="0.1 W", Resistance="200k +/- 1%", Assembled?=Yes, MFP=ERJ-3EKF2003V
TP1 TP2 TP3 TP4 TP10 TP11: library part TEST-POINT-0001, "Oranange PC Test Point, Miniature Phoisphor Bronze Silver Plating Through Hole Mounting Type"
U2: library part IC-CAN-TRANSCEIVER-0002, "1/1 Transceiver CANbus 8-VSON (3x3)", Manufacturer="Texas Instrument", CAN Capability=FD-CAN, Manufacturer Part Number=TCAN1042HGDRBTQ1
U3: library part IC-LDO-3.3V-0002, "Linear Voltage Regulator IC Positive Fixed 1 Output 500mA SOT-223-4", Current="500 mA", Package=SOT-223-4, Vin=25V, Vout=3.3V
U4: library part IC-LDO-5V-0003, "Linear Voltage Regulator IC Positive Fixed 1 Output 500mA SOT-223-4", Current="500 mA", Manufacturer="Texas Instruments", Package Size=SOT223-4, Assembled?=no, Manufacturer Part Number=UA78M05IDCYR, Type="Low dropout (LDO)"
U5: library part IC-STM32G431CBU6, "128KB 1.71V~3.6V ARM-MSeries 32KB 170MHz FLASH 42 UFQFPN-48(7x7) Microcontroller Units (MCUs/MPUs/SOCs) ROHS", Package=UFQFPN-48, Assembled?=no, Manufacturer Part Number=STM32G431CBU6
X1 X5: library part "Micro-Fit Molex 2 Pin Vertical", Package=43650-0215, DeviceName=43650-0215, DeviceSetName=HEADER_POS2_?, GateName_1=G$1, LibraryName=con-molex-micro-fit-3_0_2, SymbolName_1=HEADER_POS2
X3 X6 X8: library part "Micro-Fit Molex 4 Pin 2 Row Vertical", Package=43045-0412, DeviceName=43045-0412, DeviceSetName=HEADER_POS4_?, GateName_1=G$1, LibraryName=con-molex-micro-fit-3_0_2, SymbolName_1=HEADER_POS4
X4 X7: library part "Micro-Fit Molex 8 Pin 2 Row Vertical", Package=43045-0812, DeviceName=43045-0812, DeviceSetName=HEADER_POS8_?, GateName_1=G$1, LibraryName=con-molex-micro-fit-3_0_2, SymbolName_1=HEADER_POS8

## Free pads (board coordinates)
  round 250 hole 150: ""(127.95,1190) ""(2825,1820) ""(3335,150)

## Via types
v1: diameter 16, hole 8, Top Layer to Bottom Layer, 96 vias
v2: diameter 11.81, hole 7.87, Top Layer to Bottom Layer, 14 vias
v3: diameter 60, hole 30, Top Layer to Bottom Layer, 2 vias

## Nets (pads, with @x,y where several pads share a name; then routed paths per layer and width w, separated by ;. In a path a pad name is that pad's centre, name@x,y a point inside that pad or via, vN(x,y) a via of type N, cw(c..) or ccw(c..) an arc to the next point about the centre after c; other vN are vias at no path point)
5V: C51.1 C54.1 C55.1 TP10.1 U2.3 U4.3 X3.P$4 | length 4203.8
  Top Layer w10: TP10.1@1875,422.9 TP10.1 1875,250 2040,85 2125.53,85 2190.53,150 X3.P$4 ; C55.1 2757.48,955 C55.1@2762.48,950 ; 2788.84,924.34 2788.14,924.34 C55.1@2767.48,945 ; C54.1@2823.5,945 C55.1@2767.48,945 ; v1(2837.8,842.2) U2.3 ; v1(3030,1055) 3000,1025 2837.48,1025 C55.1@2762.48,950 ; C55.1@2762.48,950 2757.48,945 C55.1@2767.48,945 ; C55.1@2762.48,950 C55.1@2767.48,945
  Top Layer w50: U4.3@2076.72,1290.87 C51.1 2170.39,1290.47 2245.96,1290.47 2252.29,1284.13 v3(2255,1284.13)
  Bottom Layer w10: v1@2788.84,914.34 2788.84,881.16 2826.65,843.35 2836.65,843.35 v1(2837.8,842.2)
  Bottom Layer w50: X3.P$4 2300,45 3075,45 3145,115 3145,940 2800.87,1284.13 v3(2255,1284.13)
  other v1: 2790,915
12V_MOTOR_BOOT: C11.2 LM1.6 | length 98.5
  Top Layer w10: LM1.6 935,1531.1 960,1506.1 C11.2@960,1500
12V_MOTOR_EN: LM1.18 R1.1 R2.1 | length 424
  Top Layer w10: LM1.18 LM1.18 994.13,1761.01 1033.12,1800 1155,1800 1169,1786 1169,1767.5 R2.1@1170,1766.5 ; R2.1@1180,1766.5 1180,1765.51 1205.51,1740 1291.5,1740 1312.36,1760.87 1313.35,1760.87 1330,1777.52 R1.1
12V_MOTOR_FB: C21.2 LM1.12 R6.2 R7.1 | length 187.4
  Top Layer w10: LM1.12 1098.98,1630.47 R6.2 ; C21.2@1108.5,1580 R6.2 ; R7.1@1110,1703.5 1110,1641.5 R6.2
12V_MOTOR_MAIN: C12.1 C13.1 C14.1 C15.1 C16.1 C17.1 C18.1 C19.1 C20.1 C21.1 C44.1 C45.1 C46.1 C47.1 C50.1 C52.1 D5.2 D6.2 L1.2 Q3.3 Q4.3 R6.1 R17.2 R18.2 TP4.1 U3.1 U4.1 | length 1376.9
  Top Layer w10: TP4.1 195,950 355,950 ; C21.1@1155,1543.5 C21.1 ; C21.1@1171.5,1580 R6.1 1181.5,1650 1235,1650 1270,1685 1447.02,1685 1510,1622.02 1510,1230 1470,1190 1470,1065
12V_MOTOR_PG: LM1.16 Q1.1 R5.1 | length 755.2
  Top Layer w10: LM1.16 1033.43,1741.54 v1(1050,1758.11) v1@1050,1760 ; v1(1315,1390) 1315,1422.01 R5.1 1337.01,1432.01 1350,1445 1350,1501.77 1376.85,1528.62 1376.85,1530.59 1383.66,1537.4 Q1.1
  Bottom Layer w10: v1(1050,1758.11) 1050,1593.77 1254.92,1388.85 v1@1316.15,1388.85
12V_MOTOR_SW: C11.1 L1.1 LM1.1 LM1.2 LM1.3 LM1.4 LM1.5 TP3.1 | length 934.2
  Top Layer w10: TP3.1 140,945 400,1205 805,1205 860,1260 860,1263.84 ; L1.1@955.16,1276.85 L1.1
12V_MOTOR_VCC: C10.1 LM1.8 R4.1 R5.2 | length 597.3
  Top Layer w10: LM1.8 974.37,1550.13 990,1534.5 990,1441.48 1022.14,1409.35 1137.86,1409.35 1168.1,1439.59 1168.1,1466.25 1198.35,1496.5 C10.1 1236.5,1495 R5.2 R4.1
CAN_N: R28.1 U2.6 X6.P$3 X8.P$3 | length 1084.6
  Top Layer w15: U2.6 3012.83,842.2 3045.24,809.8 R28.1 3073.07,809.8 3086.24,822.97 3086.24,842.56 3095.03,851.35 3115.33,851.35 3298.55,1034.58 3298.55,1137.57 3307.34,1146.35 ; X8.P$3 3344.34,1589.46 3307.22,1589.46 3298.43,1580.68 3298.43,1369.98 3298.55,1369.87 3298.55,1162.43 3307.34,1153.65 3344.46,1153.65 X6.P$3
CAN_P: R28.2 U2.7 X6.P$1 X8.P$1 | length 1082.7
  Top Layer w15: U2.7 3009.43,867.8 3030.38,888.74 3030.38,897.03 3043.55,910.2 R28.2 3073.07,910.2 3086.24,897.03 3086.24,879.13 3095.03,870.35 3107.46,870.35 3279.55,1042.44 3279.55,1126.23 3270.77,1135.01 3244.99,1135.01 X6.P$1 3244.99,1164.99 3270.77,1164.99 3279.55,1173.77 3279.55,1361.99 3279.43,1362.12 3279.43,1569.34 3270.65,1578.12 3244.87,1578.12 X8.P$1
CAN_STB: R27.2 U2.8 U5.38 | length 855.4
  Top Layer w10: v1(2360,552.91) 2360.71,553.62 2360.71,576.42 U5.38 ; v1(2705,785) 2840,920 2956.65,920 2974.68,938.03 2974.68,940 ; 2974.68,935 2974.9,934.78 2974.9,893.6 U2.8
  Bottom Layer w10: v1(2360,552.91) 2494.56,552.91 2705,763.35 v1(2705,785)
DEBUG_LED_0: U5.9
DEBUG_LED_1: U5.10
DEBUG_LED_2: U5.11
DIR_1_In: I2.5 I3.5 I4.6 R16.1 | length 1835.1
  Top Layer w10: I3.5@315,222.28 I3.5 315,290 345,320 445,320 555,210 v1(610,210) ; I4.6 v1(1365,315) 1390,340 1455,340 1505,290 1505,240 1545.32,199.69 I2.5 ; v1(1725,235) 1726.62,235 1728.5,236.88 1748.5,236.88 1755.32,243.69 R16.1
  Bottom Layer w10: v1(610,210) 715,315 v1(1365,315) ; v1(1545,200) 1690,200 v1(1725,235)
DIR_2_In: I1.5 I3.6 I4.5 R15.1 | length 1423.7
  Top Layer w10: I1.5 194.61,254.63 194.69,254.55 R15.1 ; I1.5@200,254.39 227.01,254.39 291.41,190 332.72,190 365,222.28 I3.6 v1(365,290) ; v1(1315,215) I4.5
  Bottom Layer w10: v1(365,290) 531.12,123.88 1223.88,123.88 v1(1315,215)
FDCAN_RX: U2.4 U5.33 | length 688.9
  Top Layer w10: v1(2280,675) 2294.21,660.79 U5.33 ; v1(2640,725) 2767.36,725 2858.98,816.61 U2.4
  Bottom Layer w10: v1(2280,675) 2332.88,727.88 2543.36,727.88 2546.24,725 v1(2640,725)
FDCAN_TX: U2.1 U5.34 | length 788.5
  Top Layer w10: v1(2255.81,655.81) 2255.81,654.19 2268.9,641.1 U5.34 ; v1(2640,760) 2706.81,760 2840.2,893.39 U2.1
  Bottom Layer w10: v1(2255.81,655.81) 2256.15,656.15 2256.15,677.8 2338.35,760 v1(2640,760)
GND: C1.2 C2.2 C3.2 C4.2 C5.2 C6.2 C7.2 C8.2 C10.2 C12.2 C13.2 C14.2 C15.2 C16.2 C17.2 C18.2 C19.2 C20.2 C42.2 C43.1 C44.2 C45.2 C46.2 C47.2 C50.2 C51.2 C52.2 C53.2 C54.2 C55.2 C56.2 C57.2 C58.2 C59.2 C60.2 C61.2 C62.2 C63.2 D3.2 D4.2 D7.1 D8.1 D11.1 D14.1 D17.2 I1.2 I1.4 I2.1 I2.4 I3.7 I4.7 LM1.13 LM1.14 LM1.15 LM1.17 LM1.19 LM1.24 LM1.25 LM1.26 LM1.27 LM1.28 LM1.29 LM1.30 LM1.31 P1.3 Q1.2 Q5.2 Q6.2 Q7.3 R2.2 R7.2 R27.1 R32.1 TP2.1 U2.2 U2.9 U3.2 U4.2 U5.49 X3.P$2 X4.P$1 X4.P$2 X4.P$5 X4.P$6 X6.P$2 X6.P$4 X7.P$1 X7.P$2 X7.P$3 X7.P$4 X8.P$2 X8.P$4 | length 2819
  Top Layer w4: R32.1@1816.5,1637.99 R32.1
  Top Layer w10: v1@20,295 v1(20.5,294.5) 21,294 I1.2 I1.2@61.81,293.76 ; v1(20.37,254.63) I1.4 ; v1(85,355) 116,355 C42.2 ; v1(210,100) D7.1 D7.1@242.36,137.52 ; v1(345,650) 366.26,650 385.87,669.61 C47.2 ; v1(370,765) C19.2 ; v1(375,595) C44.2 ; I3.7 v1(415,291.16) ; C12.2 v1(480,1420) ; v1@560,440 Q6.2@560,459 ; v1(585.62,434.5) Q6.2@585.59,459 ; v1(611.2,433.4) Q6.2@611.18,459 ; v1(705,430) 705,374.94 727.56,352.39 D11.1 ; v1(705,1950) 706.62,1950 710.13,1946.5 C4.2 ; C6.2 v1(810,1984.13) ; LM1.30 LM1.29 LM1.28 LM1.27 ; LM1.26 LM1.25 ; 855,1765 856.26,1763.74 LM1.25 ; C8.2 v1(875,1984.13) ; LM1.24 LM1.25 ; C7.2 v1(940,1984.13) ; LM1.19 974.37,1759.37 975,1760 ; C5.2 v1(1005,1984.13) ; 1013.65,1753.88 1013.7,1753.84 LM1.17@1013.7,1741.61 ; LM1.13 LM1.14 ; LM1.15 LM1.14 ; C3.2@1066.78,1946.5 v1(1085.41,1927.87) ; 1070,1670 1069.92,1669.92 1049.25,1669.92 LM1.14 ; D14.1 1077.44,352.39 1100,374.94 v1(1100,430) ; v1@1075,1735 1076.15,1736.15 1085.64,1736.15 1110,1760.51 R7.2 ; v1(1165,440) Q5.2@1165,465 ; R2.2@1180,1703.5 1216.88,1703.5 1217.23,1703.85 1221.15,1703.85 ; v1@1190.51,447.19 1190.59,447.27 Q5.2@1190.59,465 ; v1@1216.18,439.91 Q5.2@1216.18,465 ; C2.2 1243.43,1957.8 1277.44,1923.78 1289.11,1923.78 v1(1290.26,1922.63) ; C45.2 v1(1420,635) ; C20.2 v1(1450,815) ; C17.2 v1(1451.5,880) ; I4.7 v1(1415,315) ; C14.2 v1(1420,1205) ; C46.2 v1(1470,725) ; v1(1455,100) 1510.12,100 D8.1 ; v1(1510,1165) 1510,1124.65 C15.2 C15.2@1515.35,1120 ; v1(1570,1495) 1597.2,1495 D17.2 ; C43.1 v1(1715,95) ; I2.4 1739.61,199.69 1747.1,207.18 1755.53,207.18 v1(1756.68,208.32) ; D4.2 1848.5,133.5 v1(1850,135) ; v1(1816.5,1588.5) 1816.5,1590.13 1818.5,1592.14 R32.1 ; v1(1940,1580) 1940,1547.22 1962.56,1524.66 U4.2@1983.74,1524.66 ; v1(2280,935) 2308.5,935 C62.2 ; C61.2 2528.15,888.35 2546.65,888.35 v1(2555,880) ; C60.2 2523.03,977.53 v1(2547.53,977.53) ; C59.2@2680,518.5 C58.2@2735,518.5 ; C55.2 2700,961.5 v1(2700,990) ; C58.2@2750,513.5 C57.2 ; C57.2@2820,513.5 C56.2 ; U2.2 2894.32,867.8 2898.41,863.71 U2.9@2898.41,856.94 ; C56.2@2870,513.5 C56.2 ; C54.2 v1(2886.5,998.5) ; v1(2930,985) 2930.16,984.84 2930.16,955.16 R27.1 ; v1(3005,530) 2990,515 2866.5,515 C56.2
  other v1: 559.94,434.28 1190.81,440.08 1216.08,439.91 2365,625 2536.57,631.5 2459.04,709.04 2535,780 2365,790 1240,1705 1069.77,1738.23 985,1785
  other v2: 2920,817.6 2941.65,855 2898.35,856.97 2920,892.4 890.12,1634.41 935,1634.41 979.88,1634.41 867.68,1660 912.56,1660 957.44,1660 1002.32,1660 890.12,1685.59 935,1685.59 979.88,1685.59
HO_1G: D10.2 D16.2 I3.3 R25.2 | length 712.7
  Top Layer w10: v1(130,575) D10.2 131.97,651.8 D10.2@137.56,657.39 ; R25.2 205,724.83 D10.2@137.56,657.39 ; D16.2 D10.2@137.56,657.39 ; v1(345,485) 345,474.57 365,454.57 I3.3
  Bottom Layer w10: v1(130,575) 220,485 v1(345,485)
HO_1M: Q4.1 R26.2 | length 634
  Top Layer w10: R26.2 245.19,884.5 274.5,884.5 v1(275,885) ; Q4.1 v1(742.98,672.98) v1@745,675
  Bottom Layer w10: v1(275,885) 530.95,885 v1(742.98,672.98)
HO_2G: D9.2 D15.2 I4.3 R23.2 | length 688.9
  Top Layer w10: I4.3 1365,440.71 1395.71,410 1490,410 1542.8,462.8 D9.2 ; D9.2@1590,495 1600,485 D15.2 1611.81,553.39 1634.37,575.94 1634.37,655.16 1670,690.79 1670,770 1655,785 R23.2
HO_2M: Q3.1 R24.2 | length 354.3
  Top Layer w10: Q3.1 1240,657.36 v1(1240,656.18) v1@1240,655 ; v1(1520,670) R24.2
  Bottom Layer w10: v1(1240,656.18) 1253.82,670 v1(1520,670)
I2C1_SCL: R30.1 U5.46 X4.P$7 | length 676.7
  Top Layer w10: R30.1 R30.1@2524.86,416.35 ; R30.1@2508.98,415.48 2519.86,426.35 2519.86,571.24 2518.9,572.2 U5.46 ; R30.1@2509.48,414.99 2509.48,360.52 2535.53,334.47 2705.53,334.47 2745,295 2745,230 2795.39,179.61 2795.39,159.61 X4.P$7
I2C1_SDA: R29.1 U5.47 X4.P$3 | length 421.3
  Top Layer w10: U5.47 2538.58,547.91 2613.86,472.64 2613.86,471.65 2630.51,455 2632.48,455 2649.13,438.35 2649.13,437.36 2800,286.5 X4.P$3@2800,265.3
LIMIT_0_A: U5.2 X7.P$5 | length 826.8
  Top Layer w10: U5.2 2587.8,621.42 2592.57,616.64 3078.36,616.64 3155,540 3280.94,540 X7.P$5
LIMIT_0_B: U5.3 X7.P$6 | length 786
  Top Layer w10: U5.3 3297.95,641.1 X7.P$6
LIMIT_0_C: U5.4 X7.P$7 | length 785.8
  Top Layer w10: U5.4 3300.79,660.79 3316.32,676.32 3316.32,677.27 X7.P$7
LIMIT_0_D: U5.5 X7.P$8 | length 826
  Top Layer w10: U5.5 3090.47,680.47 3175,765 3285.94,765 X7.P$8
LO_1: D7.2 D12.2 I3.8 R21.2 | length 591.1
  Top Layer w10: I3.8 465,107.8 D7.2 583.39,100 D12.2 611.81,83.39 634.37,105.94 634.37,165.16 665,195.79 665,305 645,325 R21.2
LO_2: D8.2 D13.2 I4.8 R22.2 | length 655.4
  Top Layer w10: R22.2 1185.32,325 1165.32,325 1140,299.69 1140,200 1175.63,164.37 1175.63,105.94 1198.19,83.39 D13.2 1300.59,83.39 D8.2 1332.2,116.97 1369.72,154.49 1375.63,154.49 1465,243.86 I4.8
M+: C48.2 D5.1 D10.1 D11.2 I3.4 Q4.2 Q6.3 X5.P$1 | length 733.2
  Top Layer w10: D10.1 131.97,458.88 198.09,525 C48.2 288.5,481.06 315,454.57 I3.4 ; Q6.3@589.53,533.8 Q6.3@598.39,533.8
  Top Layer w20: I3.4 315,380 330,365 475,365 510,400 510,454.28 Q6.3@589.53,533.8
M-: C49.2 D6.1 D9.1 D14.2 I4.4 Q3.2 Q5.3 X5.P$2 | length 751.6
  Top Layer w10: Q5.3@1203.39,539.8 Q5.3@1233.19,510 ; C49.2 1525,556.5 v1(1525,525) ; v1(1535,425) 1535,334.88 1560.51,309.37 1560.51,307.4 1598.03,269.88 D9.1
  Top Layer w20: Q5.3@1233.19,510 1305,510 ; I4.4 1315,500 1305,510 ; v1(1335,510) 1305,510
  Bottom Layer w10: v1(1335,510) 1365,480 1480,480 v1(1525,525) 1535,515 v1(1535,425)
MOTOR_0_DIR: I1.6 I2.6 U5.28 | length 2534.9
  Top Layer w10: I1.6 191.57,274.39 224.39,274.39 v1(224.7,274.7) v1@225,275 ; v1(1554.18,180) 1628.04,180 1767.49,319.45 1767.49,392.49 1840,465 1945,465 2239.21,759.21 U5.28
  Bottom Layer w10: v1(224.7,274.7) 249.7,274.7 325,350 1410,350 1490,270 1490,228.35 1538.35,180 v1(1554.18,180)
MOTOR_0_PWM: I1.1 I2.2 U5.27 | length 2811.3
  Top Layer w10: I1.1 v1(103.69,313.69) ; I2.2 1759.69,160.31 v1(1760,160) ; v1@1747.02,346.15 1720,373.17 1720,450 1760,490 1935,490 2223.9,778.9 U5.27
  Bottom Layer w10: v1(103.69,313.69) 185,395 v1(1720,395) ; v1(1748.65,346.15) 1820,274.8 1820,220 v1(1760,160)
NetC9_1: C9.1 LM1.11 | length 105.1
  Top Layer w10: LM1.11 1033.43,1571.57 1070.5,1534.5 1070.5,1521 C9.1
NetC9_2: C9.2 LM1.9 R3.2 | length 180.7
  Top Layer w10: LM1.9 994.06,1554.3 1012.56,1535.8 1012.56,1510.79 1035,1488.35 R3.2@1035,1446.5 ; R3.2 R3.2@1064.13,1424.38
NetC48_1: C48.1 I3.2 | length 115
  Top Layer w10: C48.1 352.48,525 408.19,469.29 408.19,443.66 I3.2
NetC49_1: C49.1 I4.2 | length 122.5
  Top Layer w10: I4.2 v1(1415,500) ; v1(1445,530) 1445,556.5 C49.1
  Bottom Layer w10: v1(1415,500) v1(1445,530)
NetD1_1: D1.1 R4.2 | length 118
  Top Layer w10: R4.2@1300,1605 1300,1620.89 1295.76,1616.65 1295.76,1625 D1.1@1383.5,1625
NetD1_2: D1.2 Q1.3 | length 123.2
  Top Layer w10: D1.2@1450,1625 1460,1615 Q1.3@1460,1505.9
NetD3_1: D3.1 R15.2 | length 54.1
  Top Layer w10: D3.1 145.31,205 146.54,206.22 148.5,206.22 155.31,213.03 R15.2@155.31,215
NetD4_1: D4.1 R16.2 | length 52.8
  Top Layer w10: R16.2 1794.68,206.81 D4.1
NetD12_1: D12.1 R19.1 R21.1 | length 124.7
  Top Layer w10: R19.1 575.47,369.84 575.47,325.16 R21.1 575.63,279.17 598.19,256.61 D12.1
NetD13_1: D13.1 R20.2 R22.1 | length 154.2
  Top Layer w10: D13.1@1190.63,275.98 D13.1 1229.68,276.3 R22.1 R20.2@1229.68,375 ; R20.2@1234.53,375.16 R20.2
NetD15_1: D15.1 R23.1 R24.1 | length 140.9
  Top Layer w10: R24.1 1521.97,745 1553.19,776.22 1563.5,776.22 R23.1@1570.32,783.03 ; R23.1 R23.1@1570.32,783.03 ; D15.1 1592.87,726.61 1570.32,749.17 R23.1@1570.32,783.03
NetD16_1: D16.1 R25.1 R26.1 | length 120.9
  Top Layer w10: R26.1 205.16,883.84 205.16,843.84 R25.1 266.93,843.68 D16.1
NetI3_1: I3.1 R18.1 | length 106.8
  Top Layer w10: R18.1 435,510 435,484.57 465,454.57 I3.1
NetI4_1: I4.1 R17.1 | length 141.7
  Top Layer w10: R17.1 1382.48,565 1458.19,489.29 1458.19,465.24 I4.1
NetLM1_10: LM1.10 R3.1 | length 247.6
  Top Layer w10: LM1.10 v1(1013.74,1561.26) v1@1015,1560 ; R3.1@1111.5,1428.19 R3.1 1111.72,1440 1128.38,1456.65 v1(1128.38,1480)
  Bottom Layer w10: v1(1013.74,1561.26) 1013.74,1541.26 1075,1480 v1(1128.38,1480)
NetQ5_1: Q5.1 R20.1 | length 109.2
  Top Layer w10: R20.1 1202.13,381.81 1202.13,393.43 1241.77,433.07 Q5.1
NetQ6_1: Q6.1 R19.2 | length 98.1
  Top Layer w10: R19.2 614.68,371.97 636.77,394.06 Q6.1
NetQ7_1: Q7.1 R31.2 R32.2 | length 274.9
  Top Layer w10: R32.2 R31.2 1943.19,1700 2043.19,1800 Q7.1
NetQ7_2: Q7.2 X1.P$1
QUAD_0_A: U5.44 X3.P$1 | length 556.2
  Top Layer w10: X3.P$1 2143.77,335 2280.95,335 2479.53,533.58 U5.44
QUAD_0_B: U5.45 X3.P$3 | length 644.9
  Top Layer w10: X3.P$3 2131.88,205 2205,205 2499.21,499.21 U5.45
SWCLK: P1.1 U5.37 | length 423
  Top Layer w10: v1@2212.56,576.36 2212.77,576.15 2213.75,577.13 U5.37
  Bottom Layer w10: P1.1 1945,575 v1(2210,575)
SWDIO: P1.2 U5.36 | length 524.8
  Top Layer w10: v1@2229.05,599.05 2231.61,601.61 2296.61,601.61 2296.73,601.73 U5.36
  Bottom Layer w10: P1.2 1863.53,633.53 1958.26,633.53 1990.43,601.35 v1(2231.35,601.35)
VBAT: C1.1 C2.1 C3.1 C4.1 C5.1 C6.1 C7.1 C8.1 D17.1 LM1.20 LM1.21 LM1.22 R1.2 R31.1 TP1.1 X1.P$2 | length 543
  Top Layer w50: R1.2@1349.11,1839.11 1365,1855 TP1.1 ; X1.P$2 1690.94,1701.93 1661.65,1672.64 1647.52,1672.64 D17.1 1748.32,1655.12 1793.2,1700 R31.1
VBAT_MCU: C42.1 C43.2 C53.1 C56.1 C57.1 C58.1 C59.1 C60.1 C61.1 C62.1 C63.1 I1.8 I2.8 R29.2 R30.2 TP11.1 U3.3 U5.1 U5.20 U5.21 U5.23 U5.35 U5.48 X4.P$4 X4.P$8 | length 7805
  Top Layer w10: I1.8 191.5,350.5 C42.1 188.07,364.08 v1(219.83,364.08) ; 1595,135 1595,110 C43.2 1610.98,95 1641.64,64.35 2837.46,64.35 X4.P$8 ; C53.1 2174.76,915 2254.76,995 2340.51,995 ; v1(2265.31,620.94) 2316.64,620.94 U5.35 ; U5.23 2361.42,856.42 v1(2375,870) ; U5.21 2400.24,843.43 2400.24,899.45 C63.1 2399.68,936.81 C62.1 2385.51,950 2340.51,995 ; U5.20 2420.47,877.95 2447.52,905 C61.1 C60.1 2447.52,966 2418.52,995 2340.51,995 ; U5.48 2639.13,577.13 ; R29.2@2568.5,455 2568.5,402.99 R30.2 2572.48,400 2589.13,383.35 2589.13,382.36 v1@2600.35,371.15 ; U5.1 2617.24,601.73 2640,578.98 ; 2645,570.51 2645,571.5
  Top Layer w50: v3@2074.61,830 2074.61,910.95 U3.3 ; U3.3@2076.93,914.45 2145.47,914.45 2146.02,915 C53.1 ; 2641.66,576.5 C59.1 C58.1 C57.1 C56.1 2938.5,576.5 v1(2940,575)
  Mid Layer 1 w50: X4.P$4 X4.P$4@2925.82,268.11 ; X4.P$4@2930.82,273.11 X4.P$4@2931.26,273.11
  Bottom Layer w10: v1@220,365 2826.22,365 X4.P$4 ; TP11.1 2130,705 2214.06,620.94 2225,620.94 ; v1(2265.31,620.94) 2225,620.94 ; v1(2375,870) 2360,870 2320,830 2225,735 2225,620.94
  Bottom Layer w50: v3@2078.78,830 2320,830 2745,830 2931.26,643.74 2931.26,279.03 X4.P$4@2925.07,272.84 ; X4.P$8 X4.P$4
  other v1: 2605.91,367.23
  other v3: 2075,830
pads on no net: I1.3 I1.7 I2.3 I2.7 LM1.7 LM1.23 U2.5 U5.6 U5.7 U5.8 U5.12 U5.13 U5.14 U5.15 U5.16 U5.17 U5.18 U5.19 U5.22 U5.24 U5.25 U5.26 U5.29 U5.30 U5.31 U5.32 U5.39 U5.40 U5.41 U5.42 U5.43 X1.1 X3.1 X4.1 X5.1 X6.1 X7.1 X8.1

## Polygon pours and split planes (outlines as drawn)
GND on Top Layer "GND_L01_P020" (solid, pour order 20): 0,5 5,10 3500,10 3500,2000 3495,2005 3490,2000 0,2000
NetQ7_2 on Top Layer "NETQ7_2_L01_P017" (solid, pour order 17): 1895,1805 1915,1825 2100,1825 2100,1980 2000,1980 1920,1900 1760,1900 1760,1805
12V_MOTOR_SW on Top Layer "12V_MOTOR_SW_L01_P015" (solid, pour order 15): 875,1195 831.67,1238.33 831.67,1571.68 831.68,1600 920,1600 920,1460 1055,1325 1055,1195
VBAT on Top Layer "VBAT_L01_P016" (solid, pour order 16): 465,1735 640,1910 1710,1910 1735,1885 1735,1840 1705.96,1810.96 990.96,1810.96 960,1780 960,1720 910,1720 910,1780 870,1820 770,1820 745,1795 745,1665 465,1665
12V_MOTOR_MAIN on Top Layer "12V_MOTOR_MAIN_L01_P003" (solid, pour order 3): 1835,1030 1835,1175 1920,1260 1920,1320 1800,1320 1720,1240 1720,1115 1690,1085 1240,1085 1145,990 645,990 540,1095 335,1095 335,910 425,820 455,790 455,505 465,495 515,495 520,500 520,609 615,704 1231,704 1285,650 1285,540 1290,535 1340,535 1350,545 1350,755 1370,775 1370,900 1410,940 1625,940 1685,880 1925,880 1925,940
M- on Top Layer "r" (solid, pour order 1): 1113.35,644 1135,665 1135,690 1200,690 1200,650 1233.5,616.5 1260,590 1260,500 1243.06,483.06 1124.06,483.06 1020,379 1020,119 995,94 940,94 910,124 910,609 945,644
M+ on Top Layer "M+_L01_P000" (solid, pour order 0): 690,644 678.51,655.49 678.51,684 610,684 610,654 570,614 535,579 535,493.29 549.29,479 695,479 785,389 785,129 820,94 875,94 895,114 895,619 870,644
GND on Mid Layer 1 "GND_L02_P004" (solid, pour order 4): 0,2000 0,0 3500,0 3500,1995 3495,2000
GND on Mid Layer 2 "GND_L03_P005" (solid, pour order 5): 0,2000 0,0 3500,0 3500,1995 3495,2000
GND on Bottom Layer "GND_L04_P011" (solid, pour order 11): 0,0 0,2000 3500,2000 3505,2005 3505,0

## Silkscreen, mask and mechanical layers (free items; w line width, h text height)
Top Overlay:
  lines w10: 3055,380 3155,380 3155,780 3055,780 3055,380 ; 3055,380 3055,480 2655,480 2655,380 3055,380 ; 795,290 795,505 1020,505 1020,290 795,290 ; 1995,380 2275,380 2275,485 1995,485 1995,475 1995,380 ; 3000,1460 3105,1460 3105,1775 3000,1775 3000,1460 ; 3005,1085 3005,1400 3110,1400 3110,1085 3005,1085
  lines w40: 1467.5,1930 1542.5,1930 ; 1505,1892.5 1505,1967.5 ; 1910,1950 1985,1950
  text "VBAT" at 1363.05,1853.05 h30
  text "GND" at 3044,1666 h30 r90
  text "GND" at 3089,1666 h30 r90
  text "12V_PGD" at 1346,1651 h30
  text "CAN_P" at 3049,1491 h30 r90
  text "CAN_N" at 3089,1491 h30 r90
  text "GND" at 3049,1291 h30 r90
  text "GND" at 3094,1291 h30 r90
  text "CAN_P" at 3054,1116 h30 r90
  text "CAN_N" at 3094,1116 h30 r90
  text "3v3" at 1891,766 h30
  text "GND" at 1766,761 h30
  text "GND" at 3099,686 h30 r90
  text "L_3" at 3139,686 h30 r90
  text "GND" at 3099,586 h30 r90
  text "L_2" at 3139,586 h30 r90
  text "GND" at 1686,501 h30
  text "DIO" at 1791,501 h30
  text "CLK" at 1891,501 h30
  text "GND" at 3099,491 h30 r90
  text "L_1" at 3139,491 h30 r90
  text "QD_A" at 2021,441 h30
  text "GND" at 2176,441 h30
  text "GND" at 2666,436 h30
  text "GND" at 2766,436 h30
  text "SDA" at 2861,436 h30
  text "3V3" at 2961,436 h30
  text "M" at 825,410 h75
  text "M" at 940,409 h75
  text "QD_B" at 2021,396 h30
  text "5V" at 2176,396 h30
  text "GND" at 2666,391 h30
  text "GND" at 2766,391 h30
  text "SCL" at 2861,391 h30
  text "3V3" at 2961,391 h30
  text "GND" at 3099,391 h30 r90
  text "L_0" at 3139,391 h30 r90
  text "+" at 825,307.5 h75
  text "-" at 940,307.51 h75
Bottom Overlay:
  drawing of 2392 lines, arcs and shapes, not listed
  text "ES" at 2130,1540 h60
  text "DA" at 1620,195 h60
  text "CY" at 2050,195 h60
  text "Brushed DC Motor Controller" at 3160,25 h60
Board Outline:
  the board outline again, w10